# Altium PCB 主控板.PcbDoc
Units mm, origin at the board's own origin, x right, y up, seen from the top; angles counter-clockwise.
Board outline 152.4 x 101.6 mm, 2 copper layers (Component Side, Bottom Layer), stack 0.325 mm thick; 31 components, 41 nets, 185 pads, 50 vias.
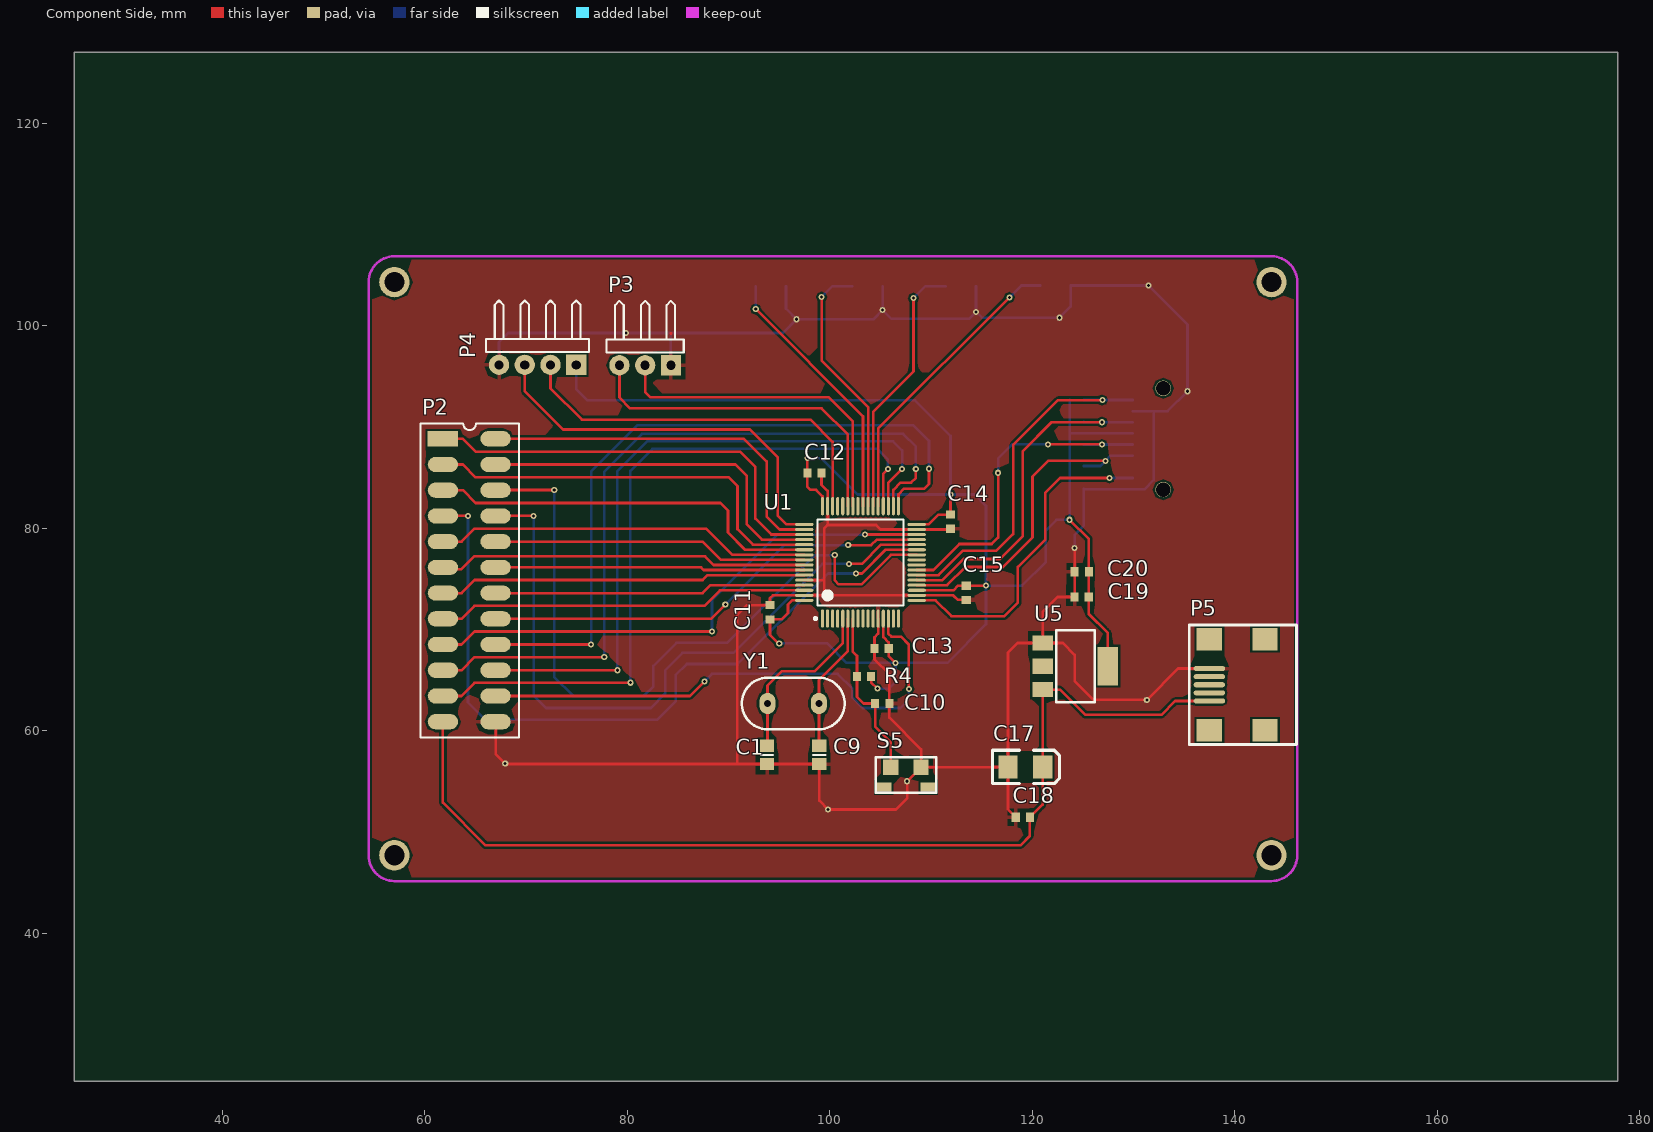
[diagram p0: Component Side view]
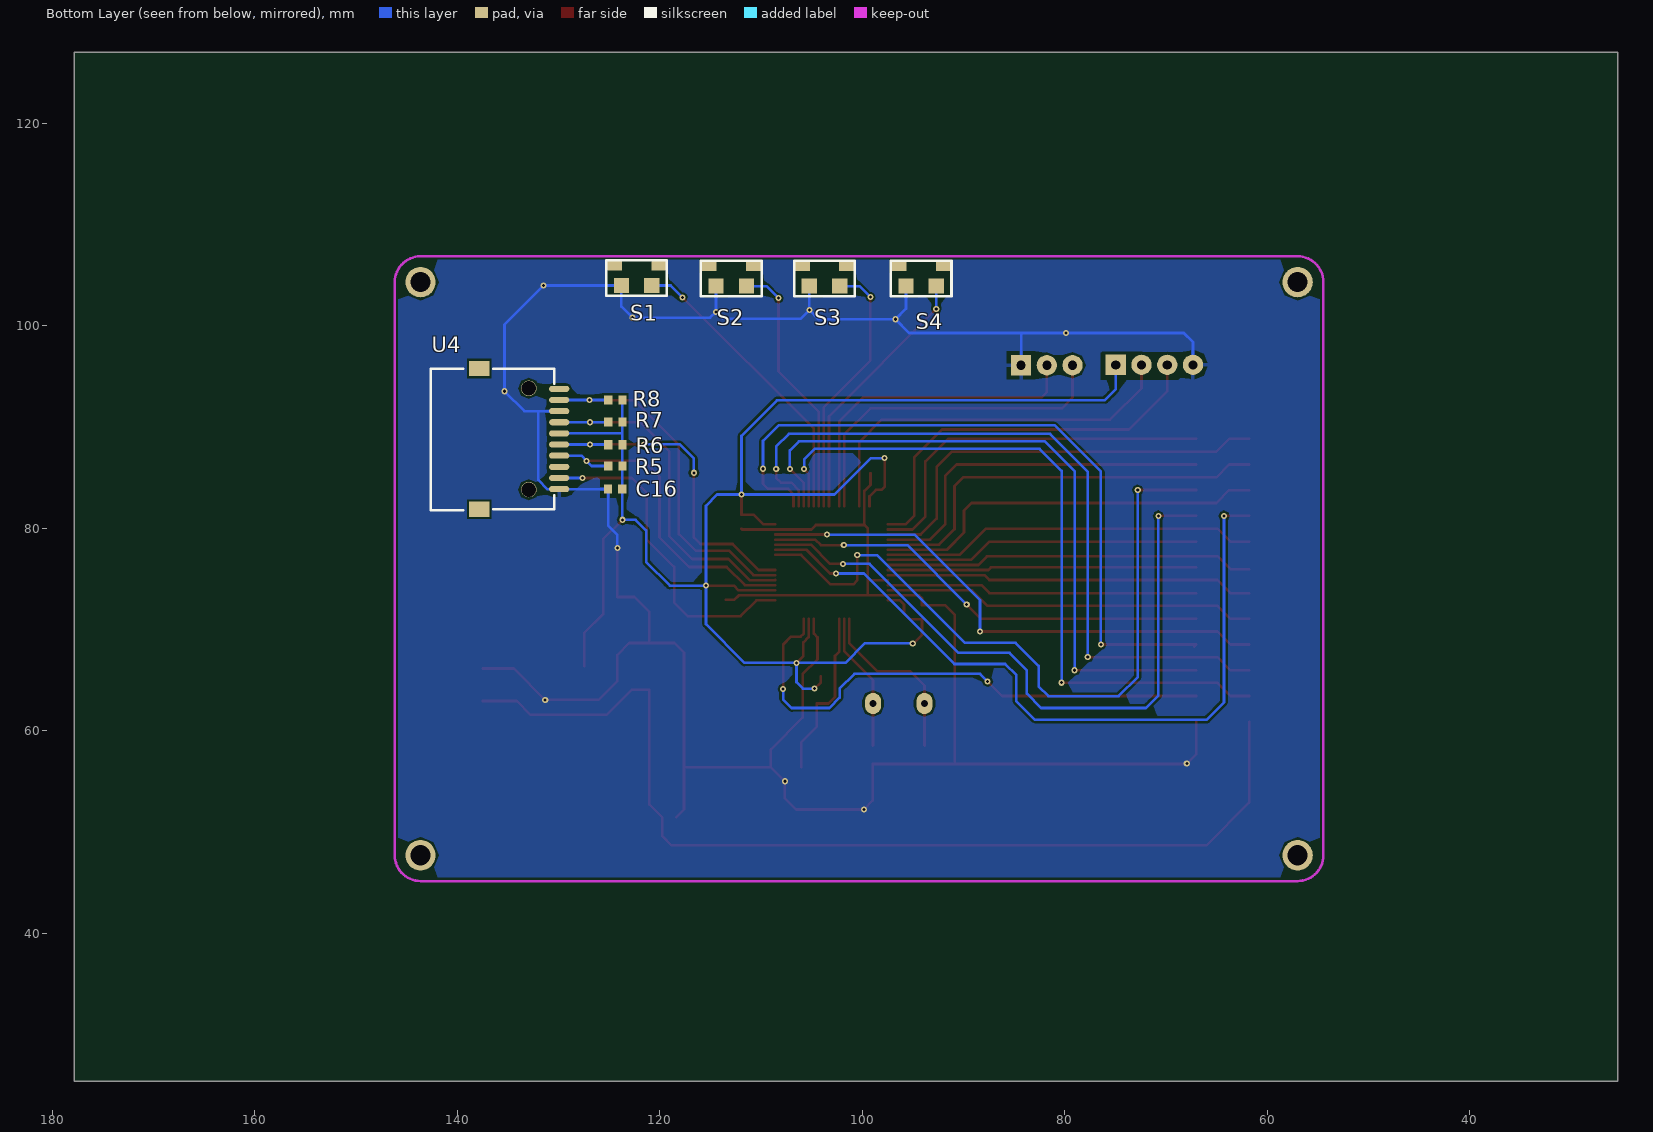
[diagram p1: Bottom Layer view, seen from below]

## Layer stack, top to bottom
Top Solder: solder mask 0.0102, Solder Resist, Dk 3.5
Component Side: signal copper 0.0356
Dielectric 1: core 0.254, FR-4, Dk 4.2
Bottom Layer: signal copper 0.0356
Solder Side: solder mask 0.0102, Solder Resist, Dk 3.5

## Board outline
25.4,25.4 177.8,25.4 177.8,127 25.4,127

## Design rules (kind name [scope] priority, off if disabled: settings)
Clearance [All] p1: gap=0.2
PolygonConnect PolygonConnect_1 [IsVia] p1: connectstyle=Direct reliefconductorwidth=0.254 reliefentries=4 polygonreliefangle="90 Angle" airgapwidth=0.254
PolygonConnect [All] p2: connectstyle=Relief reliefconductorwidth=0.4 reliefentries=4 polygonreliefangle="90 Angle" airgapwidth=0.4
RoutingTopology [All] p1: topology=Daisy_Balanced
RoutingVias [All] p1: holewidth=0.3 width=0.6 viastyle="Through Hole" minholewidth=0.3 minwidth=0.6 maxholewidth=0.3 maxwidth=0.6
SolderMaskExpansion [All] p1: expansion=0.102
UnpouredPolygon [All] p1: allowunpoured=FALSE
Width [All] p1: maxlimit=1 minlimit=0.26 preferedwidth=0.26
28 further rules are at their usual default settings.

## Components (designator, comment, footprint, x,y, rotation, side; value= is the part's Value field where it differs from the comment)
C1 "Cap Semi" 6-0805_N 93.81,57.62 r90 top
C9 "Cap Semi" 6-0805_N 98.96,57.62 r90 top
C10 "Cap Semi" 1608[0603] 105.18,62.7 r0 top
C11 "Cap Semi" 1608[0603] 94.1,71.71 r270 top
C12 "Cap Semi" 1608[0603] 98.48,85.44 r180 top
C13 "Cap Semi" 1608[0603] 105.12,68.12 r0 top
C14 "Cap Semi" 1608[0603] 111.92,80.65 r90 top
C15 "Cap Semi" 1608[0603] 113.47,73.63 r90 top
C16 "Cap Semi" 1608[0603] 124.39,83.88 r180 bottom
C17 "Cap Pol2" 3528 121.02,56.43 r0 top
C18 "Cap Semi" 1608[0603] 119.06,51.47 r0 top
C19 "Cap Semi" 1608[0603] 124.87,73.22 r0 top
C20 "Cap Semi" 1608[0603] 124.88,75.71 r0 top
P2 "Header_2X12" HDR2X12 64.4,74.87 r0 top locked
P3 "Header 3H" HDR1X3H 84.31,96.1 r180 top
P4 "Header 4H" HDR1X4H 74.96,96.14 r180 top
P5 "USB-MINI" USB-MINI 140.23,64.55 r90 top locked
R4 "Res2" 1608[0603] 103.38,65.37 r180 top
R5 "Res2" 1608[0603] 124.38,86.15 r180 bottom
R6 "Res2" 1608[0603] 124.38,88.25 r180 bottom
R7 "Res2" 1608[0603] 124.38,90.49 r180 bottom
R8 "Res2" 1608[0603] 124.38,92.67 r180 bottom
S1 "SW-PB" SW-SMD 122.28,104.97 r0 bottom
S2 "SW-PB" SW-SMD 112.94,104.91 r0 bottom
S3 "SW-PB" SW-SMD 103.72,104.91 r0 bottom
S4 "SW-PB" SW-SMD 94.18,104.91 r0 bottom
S5 "SW-PB" SW-SMD 107.52,55.4 r0 top
U1 "STM32F103RBT6" LQFP64_N 103.03,76.63 r90 top locked
U4 "TF-Card" TF-Card 133.87,88.82 r270 bottom locked
U5 "AMS1117" SOT223 121.02,68.67 r270 top
Y1 "8M" "XTAL - duplicate" 96.39,62.7 r180 top

## Footprints (in the part's own frame and the unit in brackets; to place one, negate y for a bottom-side part, rotate by r counter-clockwise, add the part's x,y. Pads: shape width x height; smd on the part's side, far side on the other; paste and mask are expansions set on the pad)
6-0805_N [mm] "Chip Resistor, Body 2.0x1.2mm, IPC Medium Density"
  rect 1.2x1.4 smd: 1(-0.9,0) 2(0.9,0)
  silkscreen extent 0,-0.6 0,0.6, body extent -1.07,-0.7 1.07,0.7, height 0.7
1608[0603] [mm] "Chip Capacitor, Body 1.6x0.8mm, IPC High Density"
  rect 0.8x0.9 smd: 1(-0.7,0) 2(0.7,0)
  body extent -0.87,-0.48 0.87,0.48, height 1.3
3528 [mil]
  rect 75x90 smd: 1(0,0) 2(-135,0)
  silkscreen extent -195,-65 65,65
HDR1X3H [mm] "Connector; Header; 3 Position; Right Angle"
  rect 2x2 hole 0.9: 1(0,0)
  round 2 hole 0.9: 2(2.54,0) 3(5.08,0)
  silkscreen extent -1.27,-6.35 6.35,-1.27
HDR1X4H [mm] "Connector; Header; 4 Position; Right Angle"
  rect 2x2 hole 0.9: 1(0,0)
  round 2 hole 0.9: 2(2.54,0) 3(5.08,0) 4(7.62,0)
  silkscreen extent -1.27,-6.35 8.89,-1.27
HDR2X12 [mm]
  rect 3x1.5 smd: 1(-2.6,13.97)
  oval 3x1.5 smd: 2(-2.6,11.43) 3(-2.6,8.89) 4(-2.6,6.35) 5(-2.6,3.81) 6(-2.6,1.27) 7(-2.6,-1.27) 8(-2.6,-3.81) 9(-2.6,-6.35) 10(-2.6,-8.89) 11(-2.6,-11.43) 12(-2.6,-13.97) 13(2.6,-13.97) 14(2.6,-11.43) 15(2.6,-8.89) 16(2.6,-6.35) 17(2.6,-3.81) 18(2.6,-1.27) 19(2.6,1.27) 20(2.6,3.81) 21(2.6,6.35) 22(2.6,8.89) 23(2.6,11.43) 24(2.6,13.97)
  silkscreen extent -4.8,-15.53 4.9,15.47
LQFP64_N [mm] "Thin QFP, 64-Leads, Body 10x10mm, Pitch 0.5mm, IPC Medium Density"
  oval 1.8x0.3 smd: 1(-5.55,3.75) 2(-5.55,3.25) 3(-5.55,2.75) 4(-5.55,2.25) 5(-5.55,1.75) 6(-5.55,1.25) 7(-5.55,0.75) 8(-5.55,0.25) 9(-5.55,-0.25) 10(-5.55,-0.75) 11(-5.55,-1.25) 12(-5.55,-1.75) 13(-5.55,-2.25) 14(-5.55,-2.75) 15(-5.55,-3.25) 16(-5.55,-3.75) 33(5.55,-3.75) 34(5.55,-3.25) 35(5.55,-2.75) 36(5.55,-2.25) 37(5.55,-1.75) 38(5.55,-1.25) 39(5.55,-0.75) 40(5.55,-0.25) 41(5.55,0.25) 42(5.55,0.75) 43(5.55,1.25) 44(5.55,1.75) 45(5.55,2.25) 46(5.55,2.75) 47(5.55,3.25) 48(5.55,3.75)
  oval 0.3x1.8 smd: 17(-3.75,-5.55) 18(-3.25,-5.55) 19(-2.75,-5.55) 20(-2.25,-5.55) 21(-1.75,-5.55) 22(-1.25,-5.55) 23(-0.75,-5.55) 24(-0.25,-5.55) 25(0.25,-5.55) 26(0.75,-5.55) 27(1.25,-5.55) 28(1.75,-5.55) 29(2.25,-5.55) 30(2.75,-5.55) 31(3.25,-5.55) 32(3.75,-5.55) 49(3.75,5.55) 50(3.25,5.55) 51(2.75,5.55) 52(2.25,5.55) 53(1.75,5.55) 54(1.25,5.55) 55(0.75,5.55) 56(0.25,5.55) 57(-0.25,5.55) 58(-0.75,5.55) 59(-1.25,5.55) 60(-1.75,5.55) 61(-2.25,5.55) 62(-2.75,5.55) 63(-3.25,5.55) 64(-3.75,5.55)
  silkscreen extent -5.67,-4.25 4.25,4.57, body extent -5,-5 5,5, height 1.6
SOT223 [mil]
  rect 59x79 smd: 1(0,0) 2(90.55,0) 3(181.1,0)
  rect 150x79 smd: 4(89.88,253.54)
  silkscreen extent -49,52 231,202
SW-SMD [mm]
  rect 1.5x1 smd: 0(-2.2,-1) 0(2.2,-1)
  rect 1.5x1.5 smd: 1(-1.5,1) 2(1.5,1)
  silkscreen extent -3,-1.5 3,2
TF-Card [mm]
  rect 1.5x2 smd: 0(-6.95,-3.95) 0(6.95,-3.95)
  round 1.524 hole 1.45: 0(-5,0.95) 0(5,0.95)
  oval 0.6x2 smd: 1(2.75,3.95) 2(1.65,3.95) 3(0.55,3.95) 4(-0.55,3.95) 5(-1.65,3.95) 6(-2.75,3.95) 7(-3.85,3.95) 8(-4.95,3.95) 9(3.85,3.95) 10(4.95,3.95)
  silkscreen extent -6.95,-8.75 7.05,3.45
USB-MINI [mm]
  rect 2.2x2.5 smd: 0(-4.5,-2.75) 0(-4.5,2.75) 0(4.5,-2.75) 0(4.5,2.75)
  oval 0.5x3.1 smd: 1(-1.6,2.75) 2(-0.8,2.75) 3(0,2.75) 4(0.8,2.75) 5(1.6,2.75)
  silkscreen extent -5.9,-5.85 5.9,4.75
"XTAL - duplicate" [mil]
  oval 62x82 hole 28: 1(-100,0) 2(100,0)
  silkscreen extent -200,-100 200,100

## Part data
C1 C9 C10 C11 C12 C13 C14 C15 C16 C18 C19 C20: "Capacitor (Semiconductor SIM Model)"
C17: "Polarized Capacitor (Axial)"
P3: "Header, 3-Pin, Right Angle"
P4: "Header, 4-Pin, Right Angle"
P5: "USB接口"
R4 R5 R6 R7 R8: "Resistor"
S1 S2 S3 S4 S5: "Switch"
U1: "STM32 ARM-based 32-bit MCU with 128 Kbytes Flash, 64-pin LQFP, Industrial Temperature"
U4: "TF存储卡"
U5: "稳压IC"
Y1: library part XTAL, "Crystal Oscillator"

## Free pads (board coordinates)
  round 3 hole 2: 0(57.01,104.31) 3(57.01,47.71) 3(57.01,104.31) 3(143.61,47.71) 3(143.61,104.31)

## Via types
v1: diameter 0.6, hole 0.3, Component Side to Bottom Layer, 50 vias

## Nets (pads, with @x,y where several pads share a name; then routed paths per layer and width w, separated by ;. In a path a pad name is that pad's centre, name@x,y a point inside that pad or via, vN(x,y) a via of type N, cw(c..) or ccw(c..) an arc to the next point about the centre after c; other vN are vias at no path point)
3V3: C11.2 C12.2 C13.2 C14.2 C15.2 C16.2 C19.2 C20.2 P4.1 R4.1 R5.2 R6.2 R7.2 R8.2 U1.13 U1.19 U1.32 U1.48 U1.64 U4.4 U5.4 | length 184.2
  Component Side w0.26: v1(95.01,68.63) 94.95,68.63 94.1,69.48 C11.2 95.24,71.01 95.87,71.64 95.87,72.46 96.29,72.88 U1.64 ; v1(97.78,86.93) C12.2 97.78,84.09 98.08,83.79 98.65,83.79 99.28,83.16 U1.48 ; R4.1 104.08,64.77 v1(104.69,64.16) ; U1.13 105.28,69.26 105.82,68.72 C13.2 105.82,67.38 v1(106.49,66.71) ; U1.19 112.2,73.88 112.65,74.33 C15.2 v1(115.43,74.33) ; U1.32 109.77,80.38 110.74,81.35 C14.2 v1(111.92,83.33) ; v1(123.68,80.84) 125.58,78.94 C20.2 125.58,73.23 C19.2 125.57,71.53 127.46,69.64 U5.4
  Bottom Layer w0.26: P4.1 74.96,93.73 76.06,92.63 108.42,92.63 111.92,89.13 v1(111.92,83.33) ; v1(95.01,68.63) 99.75,68.63 101.67,66.71 v1(106.49,66.71) ; v1(97.78,86.93) 99.15,86.93 102.75,83.33 v1(111.92,83.33) ; v1(104.69,64.16) 105.84,64.16 106.49,64.81 v1(106.49,66.71) ; R8.2 R7.2 123.68,89.38 ; U4.4 123.69,89.37 123.68,89.38 ; v1(106.49,66.71) 111.6,66.71 115.43,70.54 v1(115.43,74.33) ; v1(111.92,83.33) 114.32,83.33 115.43,82.22 v1(115.43,74.33) ; v1(115.43,74.33) 119,74.33 121.33,76.66 121.33,79.78 122.39,80.84 v1(123.68,80.84) 123.68,83.89 R5.2 R6.2 123.68,89.38
5V: C17.1 C18.2 P2.12 P5.1 U5.3 | length 101.1
  Component Side w0.26: P2.12 61.8,52.9 66.01,48.69 118.81,48.69 119.76,49.64 C18.2 121.02,52.73 C17.1 U5.3 122.74,64.07 125.23,61.58 132.73,61.58 134.1,62.95 P5.1
GND: C1.1 C9.1 C10.2 C11.1 C12.1 C13.1 C14.1 C15.1 C16.1 C17.2 C18.1 C19.1 C20.1 P2.13 P3.1 P4.4 P5.5 S1.2 S2.2 S3.2 S4.2 S5.2 U1.12 U1.18 U1.31 U1.47 U1.60 U1.63 U4.6 U4.10 U5.1 | length 318.2
  Component Side w0.26: P2.13 67,57.72 68,56.72 90.85,56.72 ; 84.31,99.23 84.33,99.25 ; U1.60 99.46,74.88 ; C12.1 99.18,84.29 99.78,83.69 99.78,80.34 ; 99.46,73.43 99.46,74.88 ; U1.12 104.78,69.59 104.42,69.23 C13.1 104.42,67.05 105.88,65.59 C10.2 105.88,61.3 109.02,58.16 S5.2 ; C14.1 111.85,79.88 105.02,79.88 104.58,80.32 99.76,80.32 99.46,80.02 99.46,74.88 ; C15.1 112.64,72.93 112.19,73.38 94.37,73.38 94.1,73.11 C11.1 91.81,72.41 90.85,71.45 90.85,56.72 ; C18.1 117.591,52.239 C17.2 ; v1(124.18,78.07) C20.1 124.18,73.23 C19.1 122.5,73.22 121.02,71.74 U5.1 ; P5.5 134.39,66.15 v1(131.3,63.06) 126.04,63.06 124.18,64.92 124.18,67.51 123.02,68.67 U5.1 ; 90.85,56.72 C1.1 C9.1 98.96,53.1 v1(99.83,52.23) 106.54,52.23 107.64,53.33 v1(107.64,55.02) S5.2 ; S5.2 117.561,56.4 C17.2 ; C17.2 117.591,67.731 118.53,68.67 U5.1
  Bottom Layer w0.26: P4.4 67.34,98.37 68.25,99.28 v1(79.86,99.28) 84.29,99.28 ; P3.1 84.31,99.26 84.29,99.28 ; S4.2 95.68,101.69 v1(96.73,100.64) ; S3.2 v1(105.22,101.54) ; S2.2 v1(114.44,101.36) ; v1(124.18,78.07) 124.18,79.35 125.09,80.26 C16.1 125.1,83.87 U4.10 131.1,83.87 131.98,84.75 131.98,91.57 ; U4.6 131.98,91.57 ; 84.29,99.28 95.37,99.28 v1(96.73,100.64) ; v1(96.73,100.64) 104.32,100.64 v1(105.22,101.54) ; v1(105.22,101.54) 106.08,100.68 113.76,100.68 v1(114.44,101.36) ; v1(114.44,101.36) 115.01,100.79 v1(122.67,100.79) 123.78,101.9 S1.2 v1(131.45,103.97) 135.32,100.1 v1(135.32,93.53) 133.36,91.57 131.98,91.57
  other v1: 67.95,56.77
NetC1_2: C1.2 U1.5 Y1.2 | length 17.5
  Component Side w0.26: C1.2 93.85,58.56 Y1.2 93.85,64.47 95.25,65.87 98.48,65.87 101.28,68.67 U1.5
NetC9_2: C9.2 U1.6 Y1.1 | length 13.8
  Component Side w0.26: C9.2 98.93,58.55 Y1.1 98.93,65.01 101.78,67.86 U1.6
NetC10_1: C10.1 R4.2 S5.1 U1.7 | length 16.9
  Component Side w0.26: U1.7 102.28,67.8 102.68,67.4 R4.2 102.68,63.36 103.34,62.7 C10.1 104.48,60.41 106.02,58.87 S5.1
NetP2_1: P2.1 U1.51 | length 42.6
  Component Side w0.26: P2.1 63.76,88.84 65.03,87.57 88.59,87.57 88.6,87.56 91.13,87.56 92.64,86.05 92.64,80.96 94.22,79.38 U1.51
NetP2_2: P2.2 U1.53 | length 41.5
  Component Side w0.26: P2.2 63.76,86.3 65.03,85.03 90.03,85.03 90.88,84.18 90.88,79.92 92.42,78.38 U1.53
NetP2_3: P2.3 U1.54 | length 39.4
  Component Side w0.26: P2.3 63.76,83.76 65.03,82.49 89.21,82.49 89.95,81.75 89.95,79.58 91.65,77.88 U1.54
NetP2_4: P2.4 U1.27 | length 74.4
  Component Side w0.26: P2.4 v1(64.27,81.22) ; v1(102.6,75.54) 103.16,75.54 105.5,77.88 U1.27
  Bottom Layer w0.26: v1(64.27,81.22) 64.27,62.81 65.99,61.09 82.95,61.09 84.78,62.92 84.78,65.5 85.88,66.6 90.9,66.6 99.84,75.54 v1(102.6,75.54)
NetP2_5: P2.5 U1.55 | length 37.3
  Component Side w0.26: P2.5 63.63,78.68 64.92,79.97 87.78,79.97 90.37,77.38 U1.55
NetP2_6: P2.6 U1.57 | length 36.6
  Component Side w0.26: P2.6@61.77,75.94 63.6,75.94 64.89,77.23 87.69,77.23 88.54,76.38 U1.57
NetP2_7: P2.7 U1.59 | length 36.4
  Component Side w0.26: P2.7 63.63,73.6 64.92,74.89 87.44,74.89 87.93,75.38 U1.59
NetP2_8: P2.8 U1.62 | length 36.8
  Component Side w0.26: P2.8 63.63,71.06 64.92,72.35 87.63,72.35 89.16,73.88 U1.62
NetP2_9: P2.9 U1.30 | length 53.1
  Component Side w0.26: P2.9 63.63,68.52 64.92,69.81 v1(88.37,69.81) ; v1(103.49,79.37) 103.5,79.38 U1.30
  Bottom Layer w0.26: v1(88.37,69.81) 88.37,72.91 94.83,79.37 v1(103.49,79.37)
NetP2_10: P2.10 U1.34 | length 75
  Component Side w0.26: P2.10 63.63,65.98 64.92,67.27 v1(77.73,67.27) ; U1.34 106.28,83.8 106.98,84.5 108.03,84.5 108.49,84.96 v1(108.49,85.86)
  Bottom Layer w0.26: v1(77.73,67.27) 77.73,85.6 81.45,89.32 107.25,89.32 108.49,88.08 v1(108.49,85.86)
NetP2_11: P2.11 U1.36 | length 71.5
  Component Side w0.26: P2.11 63.63,63.44 64.92,64.73 v1@80.31,64.73 ; U1.36 105.28,85.4 v1(105.74,85.86)
  Bottom Layer w0.26: v1(80.31,64.75) 80.31,85.68 82.47,87.84 104.7,87.84 105.74,86.8 v1(105.74,85.86)
NetP2_14: P2.14 U1.14 | length 53.4
  Component Side w0.26: P2.14 86.19,63.44 v1(87.62,64.87) ; U1.14 105.78,69.58 106.07,69.29 107.02,69.29 107.81,68.5 v1(107.81,64.13)
  Bottom Layer w0.26: v1(87.62,64.87) 88.37,65.62 100.76,65.62 102.22,64.16 102.22,63.28 103.25,62.25 106.96,62.25 107.81,63.1 v1(107.81,64.13)
NetP2_15: P2.15 U1.35 | length 67.5
  Component Side w0.26: P2.15 v1(79.02,65.98) ; U1.35 105.78,84.5 v1(107.14,85.86)
  Bottom Layer w0.26: v1(79.02,65.98) 79.02,85.64 81.96,88.58 106.25,88.58 107.14,87.69 v1(107.14,85.86)
NetP2_16: P2.16 U1.33 | length 71.6
  Component Side w0.26: P2.16@67.23,68.29 P2.16 v1(76.43,68.52) ; U1.33 106.78,83.35 107.35,83.92 109.33,83.92 109.79,84.38 v1@109.79,85.88
  Bottom Layer w0.26: v1(76.43,68.52) 76.43,85.59 81.02,90.18 108.24,90.18 109.79,88.63 v1@109.79,85.88
  other v1: 109.78,85.88
NetP2_17: P2.17 U1.29 | length 44.8
  Component Side w0.26: P2.17 88.28,71.06 v1(89.68,72.46) ; v1(101.82,78.33) 104.09,78.33 104.64,78.88 U1.29
  Bottom Layer w0.26: v1(89.68,72.46) 95.55,78.33 v1(101.82,78.33)
NetP2_18: P2.18 U1.61 | length 30.8
  Component Side w0.26: P2.18 87.44,73.6 88.22,74.38 U1.61
NetP2_19: P2.19 U1.58 | length 30.6
  Component Side w0.26: P2.19 87.28,76.14 87.54,75.88 U1.58
NetP2_20: P2.20 U1.56 | length 31.2
  Component Side w0.26: P2.20 87.44,78.68 89.24,76.88 U1.56
NetP2_21: P2.21 U1.28 | length 67.8
  Component Side w0.26: P2.21 v1(70.75,81.22) ; v1(101.9,76.48) 103.17,76.48 105.07,78.38 U1.28
  Bottom Layer w0.26: v1(70.75,81.22) 70.75,63.5 71.99,62.26 82.33,62.26 83.74,63.67 83.74,65.98 85.46,67.7 90.48,67.7 99.26,76.48 v1(101.9,76.48)
NetP2_22: P2.22 U1.26 | length 71.7
  Component Side w0.26: P2.22 67.02,83.78 v1(72.79,83.78) ; v1(100.49,77.35) 100.49,74.86 100.88,74.47 103.11,74.47 106.02,77.38 U1.26
  Bottom Layer w0.26: v1(72.79,83.78) 72.79,65.31 74.68,63.42 81.6,63.42 82.58,64.4 82.58,66.42 84.84,68.68 89.86,68.68 98.53,77.35 v1(100.49,77.35)
NetP2_23: P2.23 U1.52 | length 36.4
  Component Side w0.26: P2.23 90.69,86.3 91.81,85.18 91.81,80.38 93.31,78.88 U1.52
NetP2_24: P2.24 U1.50 | length 37.4
  Component Side w0.26: P2.24 91.52,88.84 93.77,86.59 93.77,81.15 95.04,79.88 U1.50
NetR5_1: R5.1 U1.20 U4.2 | length 32.5
  Component Side w0.26: U1.20 111.59,74.38 113.39,76.18 117.1,76.18 120.01,79.09 120.01,85.11 121.56,86.66 v1(127.22,86.66)
  Bottom Layer w0.26: R5.1 126.71,86.15 v1(127.22,86.66) 127.73,87.17 U4.2
NetR6_1: R6.1 U1.23 U4.3 | length 32.9
  Component Side w0.26: U1.23 110.23,75.88 112.8,78.45 115.99,78.45 116.62,79.08 v1(116.62,85.48) ; v1(121.55,88.28) v1@126.89,88.28
  Bottom Layer w0.26: v1(116.62,85.48) 116.62,86.89 118.01,88.28 v1(121.55,88.28) ; R6.1 125.1,88.27 U4.3
  other v1: 126.89,88.26
NetR7_1: R7.1 U1.21 U4.5 | length 34.6
  Component Side w0.26: U1.21@108.6,74.9 U1.21 111.11,74.88 113.2,76.97 116.8,76.97 119.04,79.21 119.04,87.6 121.91,90.47 v1(126.89,90.47)
  Bottom Layer w0.26: R7.1 125.1,90.47 U4.5
NetR8_1: R8.1 U1.22 U4.7 | length 35.5
  Component Side w0.26: U1.22 110.75,75.38 113.16,77.79 116.45,77.79 118.1,79.44 118.1,88.22 122.54,92.66 v1(126.91,92.66)
  Bottom Layer w0.26: R8.1 U4.7
NetS1_1: S1.1 U1.37 | length 29.5
  Component Side w0.26: U1.37 104.78,89.84 v1(117.73,102.79)
  Bottom Layer w0.26: v1(117.73,102.79) 118.91,103.97 S1.1
NetS2_1: S2.1 U1.38 | length 25.9
  Component Side w0.26: U1.38 104.28,91.5 108.26,95.48 v1(108.26,102.72)
  Bottom Layer w0.26: v1(108.26,102.72) 109.45,103.91 S2.1
NetS3_1: S3.1 U1.39 | length 26
  Component Side w0.26: v1(99.19,102.83) 99.19,96.55 103.78,91.96 U1.39
  Bottom Layer w0.26: v1(99.19,102.83) 100.27,103.91 S3.1
NetS4_1: S4.1 U1.40 | length 26.1
  Component Side w0.26: v1(92.69,101.64) 103.28,91.05 U1.40
  Bottom Layer w0.26: v1@92.68,101.64 S4.1
NetU1_17: U1.17 U4.9 | length 32.4
  Component Side w0.26: U1.17 110.45,72.88 112.01,71.32 117.23,71.32 118.57,72.66 118.57,76.2 121.28,78.91 121.28,83.51 122.74,84.97 v1(127.63,84.97)
  Bottom Layer w0.26: v1(127.63,84.97) U4.9
RX: P3.3 U1.43 | length 34.3
  Component Side w0.26: P3.3 79.23,92.91 80.29,91.85 99.2,91.85 101.78,89.27 U1.43
SWCLK: P4.3 U1.49 | length 39
  Component Side w0.26: P4.3 69.88,93.53 73.65,89.76 92.12,89.76 94.86,87.02 94.86,81.25 95.73,80.38 U1.49
SWDIO: P4.2 U1.46 | length 38.7
  Component Side w0.26: P4.2 72.42,93.82 75.51,90.73 98.08,90.73 100.28,88.53 U1.46
TX: P3.2 U1.42 | length 32.7
  Component Side w0.26: P3.2 81.77,93.45 82.29,92.93 99.91,92.93 102.28,90.56 U1.42
pads on no net: P5.0 P5.2 P5.3 P5.4 S1.0 S2.0 S3.0 S4.0 S5.0 U1.1 U1.2 U1.3 U1.4 U1.8 U1.9 U1.10 U1.11 U1.15 U1.16 U1.24 U1.25 U1.41 U1.44 U1.45 U4.0 U4.1 U4.8 U5.2

## Polygon pours and split planes (outlines as drawn)
GND on Component Side "Top Layer-No Net" (solid, pour order 2): 57.01,106.856 54.464,104.31 54.464,47.71 57.01,45.164 143.61,45.164 146.156,47.71 146.156,104.31 143.61,106.856
GND on Bottom Layer "Bottom Layer-No Net" (solid, pour order 4): 57.01,106.856 54.464,104.31 54.464,47.71 57.01,45.164 143.61,45.164 146.156,47.71 146.156,104.31 143.61,106.856

## Keep-outs
Keep-Out Layer:
  lines w0.254: 54.464,47.71 ccw(c57.01,47.71) 57.01,45.164 143.61,45.164 ccw(c143.61,47.71) 146.156,47.71 146.156,104.31 ccw(c143.61,104.31) 143.61,106.856 57.01,106.856 ccw(c57.01,104.31) 54.464,104.31 54.464,47.71

## Other copper
Bottom Layer:
  pour cut-out: 91.15,106.43 91.18,106.4 91.18,102.92 97.13,102.92 97.16,102.89 97.16,106.41
  pour cut-out: 100.76,106.41 100.73,106.38 100.73,102.98 106.68,102.98 106.71,102.95 106.74,102.98 106.74,106.38 106.71,106.38
  pour cut-out: 109.92,106.38 109.92,102.97 110,102.89 110.06,102.95 115.93,102.95 115.93,106.38
  pour cut-out: 119.27,106.46 119.27,103.01 125.28,103.01 125.28,106.38 125.23,106.43
  pour cut-out: 68.61,97.39 68.61,94.86 68.81,94.66 76.43,94.66 76.43,97.31 76.31,97.43